# EAGLE board needles_panel (EAGLE 8.6.0)

Size 330.2 x 43.69 mm. Coordinates in mm from the lower left corner, seen from the top.
Outline: 87.39,30.39 arc90 88.49,31.49 arc90 87.39,32.59 62.59,32.59 arc90 61.49,31.49 arc90 62.59,30.39 87.39,30.39
Outline: 0,0 0,43.69 330.2,43.69 330.2,0 0,0
Outline: circle at 10.19,30.59 radius 3.25
Outline: circle at 10.19,13.04 radius 3.25
Outline: circle at 25.19,30.59 radius 3.25
Outline: circle at 25.19,13.04 radius 3.25
Outline: circle at 289.31,30.59 radius 3.25
Outline: circle at 305.51,30.59 radius 3.25
Outline: circle at 305.51,13.04 radius 3.25
Outline: circle at 289.31,13.04 radius 3.25
Outline: circle at 64.99,20.99 radius 1.5
Outline: circle at 69.99,20.99 radius 1.5
Outline: circle at 74.99,20.99 radius 1.5
Outline: circle at 79.99,20.99 radius 1.5
Outline: circle at 84.99,20.99 radius 1.5
Outline: circle at 17.69,30.59 radius 1.5
Outline: circle at 17.69,21.36 radius 1.6
Outline: circle at 53.29,11.89 radius 2.85
Outline: circle at 99.97,31.59 radius 2.85
Outline: circle at 93.24,12.09 radius 1.6
Outline: circle at 209.01,31.59 radius 1.6
Outline: circle at 186.51,12.09 radius 1.6
Copper layers (1*16): Top 0.035mm / dielectric 1.5mm / Bottom 0.035mm
Design rules "default": minimum track width 6mil, minimum drill 0.35mm, track to track 6mil, track to pad 6mil, pad to pad 6mil, via to via 6mil, smd to smd 6mil, copper to edge 40mil, drill to drill 6mil, minimum pad ring 10mil, minimum via ring 8mil, stop-mask expansion 4mil, vias tented up to drill 0mil, thermal gap 10mil

## Placement (x,y rotation side)
U$1  [ON-OFF-ON]  321.69,30.59 0 top
U$2  [OCTAVE]  67.49,11.89 0 top
U$3  [OCTAVE]  82.49,11.89 0 top
U$4  [SEGMENT]  38.59,29.49 0 top
U$5  [SEGMENT]  50.79,29.49 0 top
U$6  [SHIFT]  38.59,13.89 0 top
U$7  [LEFTSIDE]  7.52,6.19 0 top
U$8  [RIGHTSIDE]  180.85,4.71 0 top
U$9  [MODELNAME]  69.4,1.91 0 top
U$10  [EF_ER]  7.8,17.11 0 top
U$11  [EL]  184.07,23.89 0 top

## Library data of the parts
U$1-U$11 = Needles Panel Library